# EAGLE board Main Board (EAGLE 9.7.0)
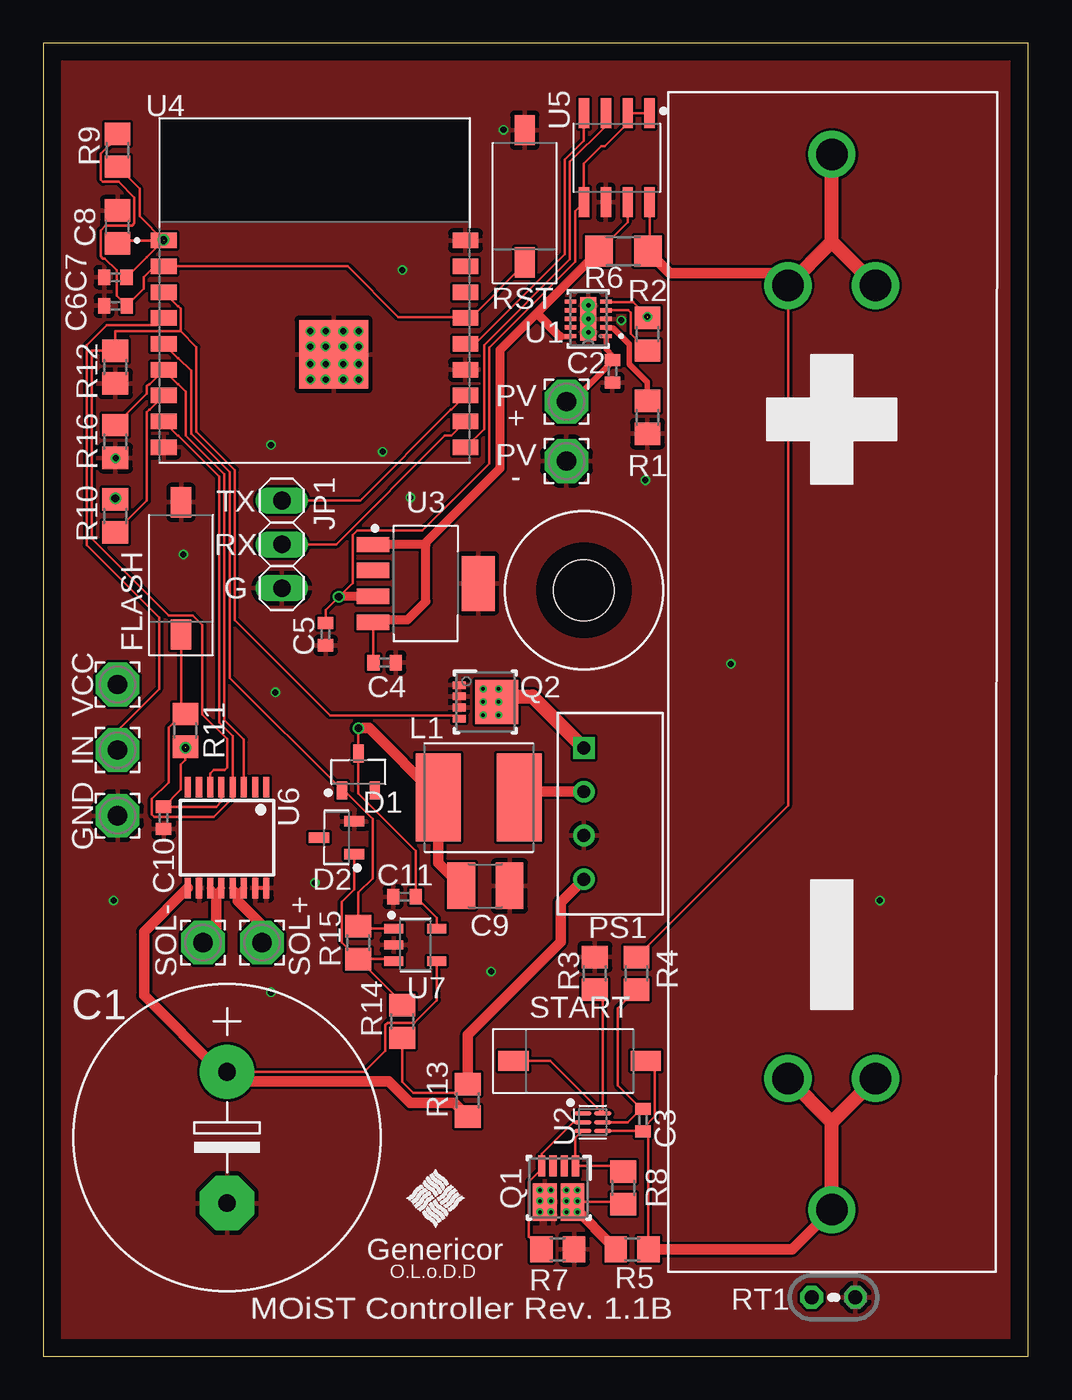
[diagram p0: board, top side]
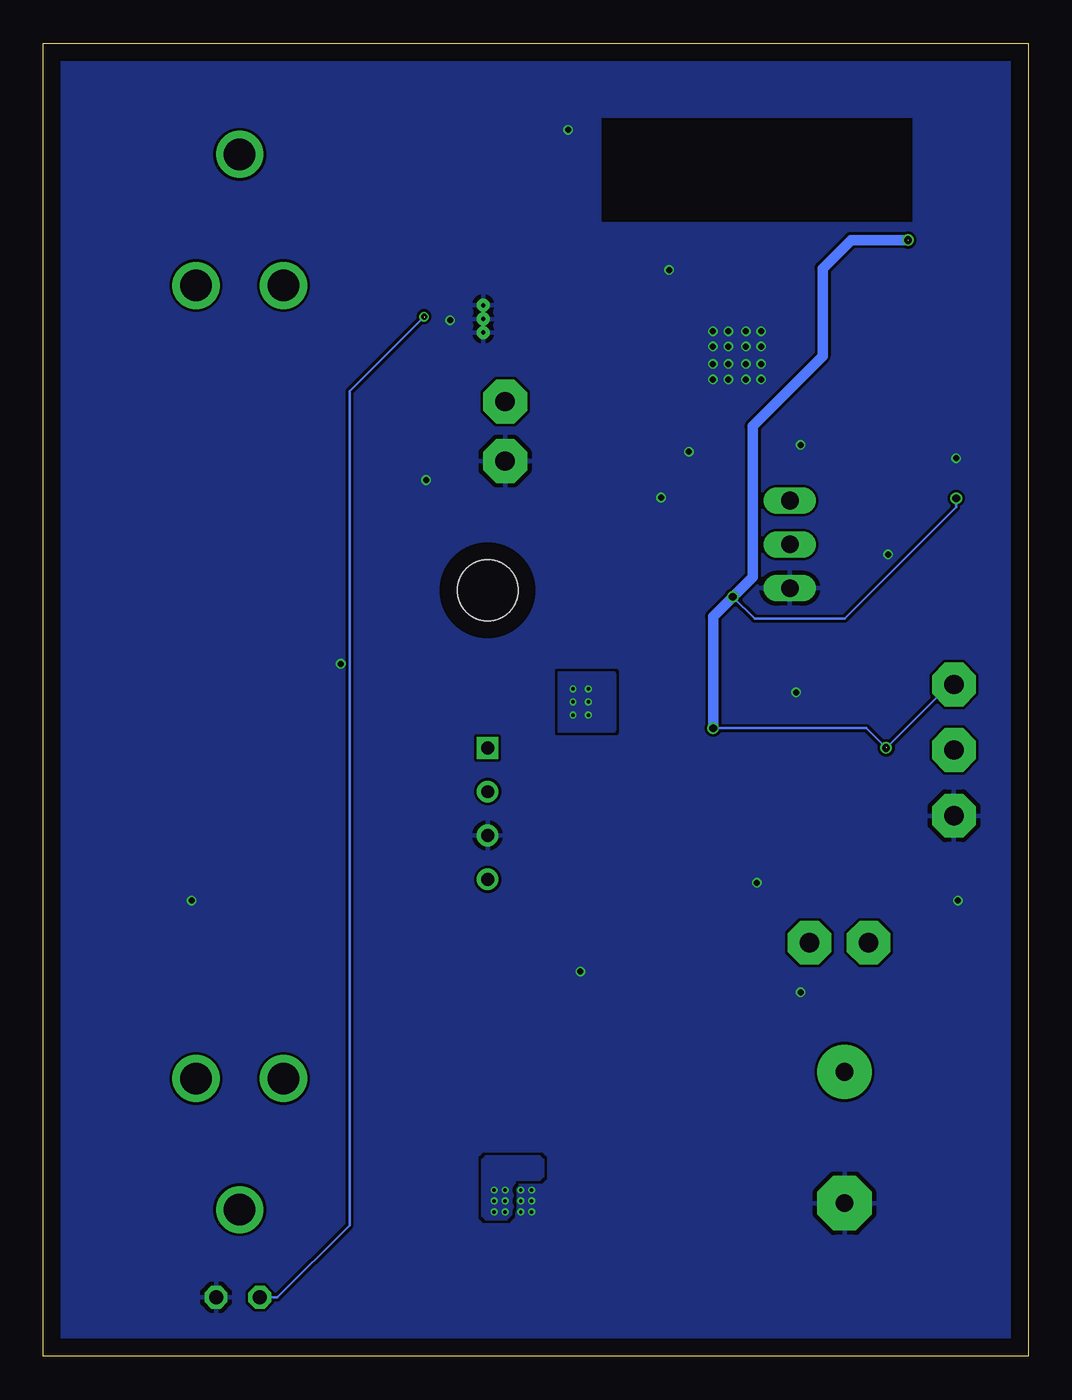
[diagram p1: board, bottom side, seen from below]

Size 57.15 x 76.2 mm. Coordinates in mm from the lower left corner, seen from the top.
Outline: 0,0 57.15,0 57.15,76.2 0,76.2 0,0
Copper layers (1*16): Top 0.035mm / dielectric 1.5mm / Bottom 0.035mm
Design rules "default *": minimum track width 6mil, minimum drill 0.35mm, track to track 6mil, track to pad 6mil, pad to pad 6mil, via to via 6mil, smd to smd 6mil, copper to edge 40mil, drill to drill 6mil, minimum pad ring 10mil, minimum via ring 4mil, stop-mask expansion 4mil, vias tented up to drill 0mil, thermal gap 10mil
Holes 3.5 mm at 31.37,44.45

## Footprints (pad centres in the part's own frame; a part is rotated, then mirrored left to right if it is on the bottom)
18650-65MM-54-PTH = drill 1.829: A1 -30.62,0; A2 -23,2.54; A3 -23,-2.54; C1 30.62,0; C2 23,2.54; C3 23,-2.54
E7,5-18 = drill 1.016 pad 3.15: + -3.81,0 | drill 1.016 pad 3.15 octagon: - 3.81,0
C0402 = smd 0.7 x 0.9: 1 -0.65,0; 2 0.65,0
C0805 = smd 1.3 x 1.5: 1 -0.95,0; 2 0.95,0
C1210 = smd 1.6 x 2.7: 1 -1.4,0; 2 1.4,0
SOT95P227X109-3N = smd 1.042 x 0.597: 1 -1.062,0.95; 2 -1.062,-0.95; 3 1.062,0
SOT95P240X110-3N = smd 1.18 x 0.609: 1 -1.024,0.95; 2 -1.024,-0.95; 3 1.024,0
S_43 = smd 1.759 x 1.177: A 3.836,0; C -3.836,0
1X03 = drill 1.016 long: 1 -2.54,0; 2 0,0; 3 2.54,0
2,54/1,1 = drill 1.118 pad 2.54 octagon: 1 0,0
INDM6060X450N = smd 2.619 x 5.111: 1 -2.346,0; 2 2.346,0
1S4E_S1U-DIP4 = drill 0.75 square: P$1 0,0 | drill 0.75: P$2 2.54,0; P$3 5.08,0; P$4 7.62,0
DMS0008A = smd 1.24 x 0.42: 1 -1.28,0.975; 2 -1.28,0.325; 3 -1.28,-0.325; 4 -1.28,-0.975 | smd 0.49 x 0.42: 5 1.655,-0.975; 6 1.655,-0.325; 7 1.655,0.325; 8 1.655,0.975 | smd 2.16 x 1.38: 9 0.82,0.805; 10 0.82,-0.805
DQG0008A = smd 0.75 x 0.44: 1 -1.525,0.975; 2 -1.525,0.325; 3 -1.525,-0.325; 4 -1.525,-0.975; 5 1.525,-0.975; 6 1.525,-0.325; 7 1.525,0.325; 8 1.525,0.975 | smd 2.5 x 2.55: 9 0.65,0
R0805 = smd 1.3 x 1.5: 1 -0.95,0; 2 0.95,0
R1206 = smd 1.6 x 1.803: 1 -1.422,0; 2 1.422,0
THERMISTOR = drill 0.813 octagon: 1 -1.27,0; 2 1.27,0
DQC10_P84X2P4 = smd 0.656 x 0.255: 1 -1.026,1; 2 -1.026,0.5; 3 -1.026,0; 4 -1.026,-0.5; 5 -1.026,-1; 6 1.026,-1; 7 1.026,-0.5; 8 1.026,0; 9 1.026,0.5; 10 1.026,1 | smd 0.94 x 2.515: 11 0,0 | drill 0.254 pad 0.508: V 0,-0.787; V_1 0,0; V_2 0,0.787
SON50P150X150X80-6N = smd 1.038 x 0.274: 1 -0.583,0.5; 2 -0.583,0; 3 -0.583,-0.5; 4 0.583,-0.5; 5 0.583,0; 6 0.583,0.5
SOT150P700X180-5N = smd 1.901 x 0.891: 1 -3.05,2.25; 2 -3.05,0.75; 3 -3.05,-0.75; 4 -3.05,-2.25 | smd 1.901 x 3.189: 5 3.05,0
MODULE_ESP-WROOM-02D = smd 1.5 x 0.9: 1 -8.75,2.9; 2 -8.75,1.4; 3 -8.75,-0.1; 4 -8.75,-1.6; 5 -8.75,-3.1; 6 -8.75,-4.6; 7 -8.75,-6.1; 8 -8.75,-7.6; 9 -8.75,-9.1; 10 8.75,-9.1; 11 8.75,-7.6; 12 8.75,-6.1; 13 8.75,-4.6; 14 8.75,-3.1; 15 8.75,-1.6; 16 8.75,-0.1; 17 8.75,1.4; 18 8.75,2.9 | smd 4 x 4: 19 1.1,-3.71
SOIC127P599X175-8N = smd 1.752 x 0.602: 1 -2.578,1.905; 2 -2.578,0.635; 3 -2.578,-0.635; 4 -2.578,-1.905; 5 2.578,-1.905; 6 2.578,-0.635; 7 2.578,0.635; 8 2.578,1.905
TSSOP16 = smd 0.35 x 1.2: 1 -2.275,-2.925; 2 -1.625,-2.925; 3 -0.975,-2.925; 4 -0.325,-2.925; 5 0.325,-2.925; 6 0.975,-2.925; 7 1.625,-2.925; 8 2.275,-2.925; 9 2.275,2.925; 10 1.625,2.925; 11 0.975,2.925; 12 0.325,2.925; 13 -0.325,2.925; 14 -0.975,2.925; 15 -1.625,2.925; 16 -2.275,2.925
SOT95P280X100-5N = smd 1.112 x 0.547: 1 -1.25,0.95; 2 -1.25,0; 3 -1.25,-0.95; 4 1.25,-0.95; 5 1.25,0.95

## Placement (x,y rotation side)
BATT  NCR18650B  [18650-65MM-54-PTH]  45.75,39.13 270 top
C1  4700µF  [E7,5-18]  10.67,12.7 270 top
C2  1µF  [C0402]  33.02,57.15 270 top
C3  0.1µF  [C0402]  34.8,13.72 270 top
C4  1µF  [C0402]  19.81,40.26 0 top
C5  1µF  [C0402]  16.38,41.91 270 top
C6  0.1µF  [C0402]  4.19,60.96 180 top
C7  0.1µF  [C0402]  4.19,62.61 180 top
C8  10µF  [C0805]  4.32,65.53 90 top
C9  2.2µF  [C1210]  25.65,27.3 0 top
C10  0.1µF  [C0402]  6.99,31.24 270 top
C11  0.1µF  [C0402]  20.95,26.67 180 top
D1  CMPD6263  [SOT95P227X109-3N]  18.29,33.91 90 top
D2  LM4040LM4040CIM3-8.2  [SOT95P240X110-3N]  17.02,30.1 180 top
FLASH  PTS636_SL43_SMTR_LFS  [S_43]  8,45.72 90 top
JP1  UART  [1X03]  13.84,47.12 270 top
JP2  PV+  [2,54/1,1]  30.35,55.4 0 top
JP3  PV-  [2,54/1,1]  30.35,51.94 0 top
JP4  SOL+  [2,54/1,1]  12.7,24 0 top
JP5  SOL-  [2,54/1,1]  9.27,24 0 top
JP6  VCC  [2,54/1,1]  4.32,38.99 0 top
JP7  IN  [2,54/1,1]  4.32,35.18 0 top
JP8  GND  [2,54/1,1]  4.32,31.37 0 top
L1  ASPI-6045S-180M-T  [INDM6060X450N]  25.27,32.43 0 top
PS1  1S4E-1U  [1S4E_S1U-DIP4]  31.37,35.31 270 top
Q1  CSD87313DMS  [DMS0008A]  29.9,9.78 270 top
Q2  CSD16406Q3  [DQG0008A]  25.65,37.97 0 top
R1  680Ω  [R0805]  35.05,54.48 90 top
R2  21.5kΩ  [R0805]  35.05,59.31 270 top
R3  330Ω  [R0805]  32,22.23 90 top
R4  330Ω  [R0805]  34.42,22.23 270 top
R5  56mΩ  [R0805]  34.16,6.22 0 top
R6  10mΩ  [R1206]  33.66,64.14 0 top
R7  5MΩ  [R0805]  29.84,6.22 0 top
R8  5MΩ  [R0805]  33.66,9.78 270 top
R9  10KΩ  [R0805]  4.32,69.98 90 top
R10  10KΩ  [R0805]  4.19,48.77 270 top
R11  10KΩ  [R0805]  8.26,36.32 90 top
R12  10KΩ  [R0805]  4.19,57.4 270 top
R13  100Ω  [R0805]  24.64,14.86 270 top
R14  10KΩ  [R0805]  20.83,19.43 270 top
R15  1MΩ  [R0805]  18.29,24 90 top
R16  10KΩ  [R0805]  4.19,53.09 270 top
RST  PTS636_SL43_SMTR_LFS  [S_43]  27.94,67.31 90 top
RT1  TT2-10KC8-3  [THERMISTOR]  45.85,3.43 180 top
START  PTS636_SL43_SMTR_LFS  [S_43]  31.11,17.14 0 top
U1  BQ24210  [DQC10_P84X2P4]  31.62,60.2 180 top
U2  BQ29733DSER  [SON50P150X150X80-6N]  31.88,13.59 0 top
U3  LP38693MPX-ADJ/NOPB  [SOT150P700X180-5N]  22.18,44.85 0 top
U4  ESP-WROOM-02D  [MODULE_ESP-WROOM-02D]  15.75,61.85 0 top
U5  INA219AID  [SOIC127P599X175-8N]  33.27,69.55 270 top
U6  TC78H630FNG/TSSOP16  [TSSOP16]  10.67,30.1 180 top
U7  LT1716  [SOT95P280X100-5N]  21.59,23.88 0 top
U$2  GENERICORLOGO  [GENERICORLOGO]  21.08,7.49 0 top

## Library data of the parts
BATT C1 D1 FLASH L1 PS1 Q1 Q2 RST RT1 START U1 U3 U5 U7 U$2 = Genericor Parts
C2-C11 = rcl; SPICEPREFIX: C
D2 = Genericor Parts; AVAILABILITY: In Stock; DESCRIPTION: Shunt Voltage Reference IC Fixed 8.192 V ±0.5% 15mA SOT-23-3; MF: Texas Instruments; MP: LM4040CIM3-8.2/NOPB; PACKAGE: SOT-23-3; PRICE: None; PURCHASE-URL: https://pricing.snapeda.com/search/part/LM4040/?ref=eda
JP1 = Connector; CATEGORY: CONNECTOR; SUB-CATEGORY: PIN-HEADER
JP2-JP8 = wirepad
R1-R16 = rcl; SPICEPREFIX: R
U2 = Genericor Parts; OCC: -0.100; OCC_DELAY: 8; OCD: 0.120; ODC_DELAY: 8; OVP: 4.400; OVP_DELAY: 1.25; SCD: 0.3; SCD_DELAY: 250; UVP: 2.800
U4 = Genericor Parts; AVAILABILITY: In Stock; DESCRIPTION: WiFi 802.11b/g/n Transceiver Module 2.4GHz ~ 2.5GHz Integrated, Trace Surface Mount; MF: Espressif Systems; MP: ESP-WROOM-02D; PACKAGE: SMD-18 Espressif Systems; PRICE: None; PURCHASE-URL: https://pricing.snapeda.com/search/part/ESP-WROOM-02D/?ref=eda
U6 = Genericor Parts; AVAILABILITY: Not in stock; DESCRIPTION: Motor Driver IC; MF: Toshiba; MP: TC78H630FNG; PACKAGE: TSSOP-16d; PRICE: None

## Nets
8.2VREF: D2.1 R14.1 R15.1 U7.3
9V+: PS1.P$4 R13.1 R14.2
!CHGD: D1.1 R15.2 U4.5 U7.1
+3V3: C5.1 C7.1 C8.1 C9.1 C10.1 C11.1 D1.3 JP6.1 L1.1 R9.1 R10.1 R11.1 U3.3 U4.1 U5.1 U5.2 U5.5 U6.5 U7.5
BAT: C3.1 R4.2 U2.5
BATT+: BATT.A1 BATT.A2 BATT.A3 R4.1 R6.2 U5.8
BATT-: BATT.C1 BATT.C2 BATT.C3 C3.2 R5.2 START.A U2.4
COUT: Q1.4 R7.1 U2.2
DOUT: Q1.1 R8.1 U2.3
DRV_1: FLASH.C R11.2 U4.8 U6.4
DRV_2: R16.1 U4.6 U6.3
DRV_EN: Q2.4 R12.1 U4.3 U6.6
EN-RST: C6.1 R9.2 RST.C U4.2 U4.15
GND: C1.- C2.2 C4.2 C5.2 C6.2 C7.2 C8.2 C9.2 C10.2 C11.2 D2.2 FLASH.A JP1.3 JP3.1 JP8.1 PS1.P$3 Q1.5 Q1.6 Q1.10 Q2.1 Q2.2 Q2.3 R1.1 R3.2 R7.2 R12.2 R16.2 RST.A RT1.1 U1.3 U1.11 U1.V U1.V_1 U1.V_2 U3.5 U4.9 U4.13 U4.18 U4.19 U5.6 U6.10 U6.15 U6.16 U7.2
IO2: R10.2 U4.7
ISET: R1.2 U1.2
METER: JP7.1 U4.4
PG-EN: U1.6 U1.7
PS1+IN: L1.2 PS1.P$2
PS1-IN: PS1.P$1 Q2.5 Q2.6 Q2.7 Q2.8 Q2.9
PV+: C2.1 JP2.1 U1.1
Q1S1: Q1.7 Q1.8 Q1.9 R5.1 R8.2
RXD: JP1.2 U4.11
SCL: U4.14 U5.4
SDA: U4.10 U5.3
SOL+: JP4.1 U6.13 U6.14
SOL-: JP5.1 U6.11 U6.12
TS: R2.1 RT1.2 U1.5
TXD: JP1.1 U4.12
V-: R3.1 START.C U2.6
VBATT: C4.1 R6.1 U1.10 U3.1 U3.4 U5.7
VM: C1.+ R13.2 U6.9 U7.4
VTSB: R2.2 U1.4

## Tracks (layer width: path | path; a pad name or v marks a point on that pad's centre or on a via)
8.2VREF
  Top 0.152: R15.1 20.83,20.51 R14.1 | U7.3 20.34,23.05 R15.1 | D2.1 18.04,27.09 17.31,26.36 17.31,24.03 R15.1
9V+
  Top 0.152: R13.1 24.13,15.3 21.46,15.3 20.83,15.94 R14.2
  Top 0.61: R13.1 24.64,18.67 30.02,24.05 30.02,26.34 PS1.P$4
!CHGD
  Top 0.152: U7.1 18.41,24.83 R15.2 18.29,26.91 19.11,27.73 19.11,31.19 17.46,32.85 D1.1 10.82,39.37 10.82,51.31 8.59,53.55 8.59,57.18 7.84,57.93 7.82,57.93 U4.5
+3V3  (via drill 0.45)  (2 unrouted)
  Top 0.152: U7.5 22.84,25.43 C11.1 21.61,29.34 18.29,32.65 D1.3 v18.29,36.45 | U5.1 U5.2 | 7.87,34.99 R11.1 8.26,34.62 7.99,34.35 7.99,32.9 C10.1 7,31.88 10.03,31.88 10.34,32.19 U6.5 10.35,33.02 | C7.1 6.02,63.79 6.97,64.75 U4.1 | U4.1 4.49,64.75 C8.1 | U4.1 5.6,66.15 5.6,67.74 R9.1 | U5.2 33.91,71.73 | 18.69,44.1 U3.3 | C5.1 16.38,43.31 v17.14,44.07 17.95,44.88 17.95,47.64 18.21,47.9 22,47.9 25.88,51.79 25.88,58.54 30.86,63.52 30.86,66.46 U5.5 31.37,69.19 32.38,70.21 32.57,70.21 33.91,71.55 U5.2 | R10.1 v4.19,49.78
  Top 0.508: U3.3 17.11,44.1 v17.14,44.07
  Top 0.61: C9.1 22.93,28.63 L1.1 18.91,36.45 v18.29,36.45
  Bottom 0.152: v18.29,36.45 9.4,36.45 v8.26,35.31 4.57,38.99 JP6.1 | v17.14,44.07 15.88,42.8 10.67,42.8 4.19,49.28 v4.19,49.78
  Bottom 0.305: v18.29,36.45 18.22,36.51
  Bottom 0.61: v18.29,36.45 18.29,42.93 v17.14,44.07 16,45.21 16,53.98 11.94,58.04 11.94,63.12 10.29,64.77 v6.99,64.77
BAT
  Top 0.152: U2.5 33.92,13.59 34.7,14.37 | C3.1 34.7,14.37 | 34.7,14.37 33.34,15.73 33.34,20.19 R4.2
BATT+
  Top 0.152: BATT.A3 43.21,31.96 R4.1 | U5.8 35.18,64.24 R6.2
  Top 0.61: BATT.A3 42.47,62.87 36.35,62.87 R6.2
  Top 0.813: 45.75,64.67 BATT.A1 | 45.75,64.67 BATT.A3 | 45.75,64.67 BATT.A2
BATT-
  Top 0.152: R5.2 35.11,12.75 C3.2 | C3.2 34.8,13.24 35.48,13.92 35.48,16.62 START.A | U2.4 34.77,13.09 C3.2
  Top 0.61: R5.2 43.46,6.22 BATT.C1
  Top 0.813: 45.75,13.59 BATT.C3 | BATT.C1 45.75,13.59 | 45.75,13.59 BATT.C2
COUT
  Top 0.152: R7.1 28.18,6.94 28.18,10.13 28.93,10.88 Q1.4 28.93,11.76 30.76,13.59 U2.2
DOUT
  Top 0.152: R8.1 33.33,11.06 Q1.1 30.88,12.67 U2.3
DRV_1
  Top 0.152: U4.8 7.82,53.43 7.84,53.43 10.21,51.06 10.21,36.79 10.99,36.01 U6.4 10.99,32.41 9.9,31.31 6.44,31.31 6.31,31.45 6.31,32.34 7.28,33.31 7.28,36.49 8.06,37.27 R11.2 8,37.53 FLASH.C
DRV_2
  Top 0.152: U6.3 11.64,35.79 10.52,36.92 10.52,51.19 8.28,53.42 8.28,55.99 7.84,56.43 7.82,56.43 U4.6 6.18,56.43 6.15,56.43 6.02,56.29 6.02,55.86 R16.1
DRV_EN
  Top 0.152: U6.6 9.69,33.82 9.91,34.04 10.54,34.04 10.67,34.16 10.67,35.81 9.23,37.25 9.23,42.44 8.68,42.99 7.29,42.99 2.83,47.45 2.83,58.35 R12.1 4.19,59.5 7.96,59.5 7.98,59.48 | U4.3 7.82,60.93 7.84,60.93 7.98,60.79 7.98,59.48 | 7.98,59.48 8.89,58.57 8.89,53.67 11.13,51.44 11.13,42.72 16.64,37.2 23.93,37.2 Q2.4
EN-RST
  Top 0.152: R9.2 4.32,70.75 3.34,69.77 3.34,68.28 3.47,68.15 4.38,68.15 5.3,67.23 5.3,65.74 5.16,65.6 3.62,65.6 3.34,65.33 3.34,63.84 3.47,63.7 3.57,63.7 4.26,63.01 4.26,61.54 C6.1 5.84,61.96 5.84,62.61 6.48,63.25 U4.2 17.66,63.25 20.61,60.31 24.44,60.31 U4.15 24.8,60.25 27.94,63.39 RST.C
GND  (via drill 0.2, 0.35)
  Top 0.203: U6.15 U6.16
  other vias: 15.5,59.48 28.81,9.65 29.45,9.65 28.81,9.02 29.45,9.02 29.45,8.38 28.81,8.38 16.39,59.48 17.41,59.48 18.3,59.48 15.5,58.59 15.5,57.58 15.5,56.69 16.39,58.59 17.41,58.59 18.3,58.59 16.39,57.58 17.41,57.58 18.3,57.58 16.39,56.69 17.41,56.69 18.3,56.69 4.2,52.12 8.14,46.53 39.89,40.18 15.76,27.48 20.84,63.04 13.22,52.88 13.47,38.53 19.69,52.5 34.93,50.85 48.54,26.45 13.22,21.13 4.09,26.45 26.7,71.17 33.54,60.12 25.99,22.33 21.3,49.83
  pour Top: 0.08,0.08 57.07,0.08 57.07,76.12 0.08,76.12
  pour Bottom (rank 6): 0.08,0.08 57.07,0.08 57.07,76.12 0.08,76.12
IO2
  Top 0.152: U4.7 6.18,54.93 6.15,54.93 6.02,54.79 6.02,49.65 R10.2
ISET
  Top 0.305: U1.2 32.69,59.66 33.08,59.66 34,58.74 34,57.58 35.05,56.53 R1.2
METER
  Top 0.152: U4.4 6.58,59.84 3.7,59.84 2.53,58.67 2.53,47.07 6.73,42.87 6.73,38.73 4.32,36.32 JP7.1
PG-EN
  Top 0.152: U1.6 U1.7
PS1+IN
  Top 0.61: PS1.P$2 27.95,32.77 L1.2
PS1-IN  (via drill 0.2)
  Top 0.152: Q2.7 26.63,38.3 Q2.9 v25.53,37.97 | Q2.7 Q2.6 Q2.5 | Q2.7 Q2.8
  Top 0.813: Q2.7 28.38,38.3 PS1.P$1
  other vias: 26.42,37.97 26.42,38.73 25.53,38.73 25.53,37.21 26.42,37.21
  pour Bottom (isolate 0.254): 24.03,36.27 27.23,36.27 27.23,39.67 24.03,39.67 23.95,39.59 23.95,36.35
PV+
  Top 0.305: U1.1 32.65,58.44 33.02,58.06 C2.1 33.02,57.73 30.69,55.4 JP2.1
Q1S1  (via drill 0.2)
  Top 0.152: R8.2 33.52,8.96 Q1.9 | v30.35,9.02 30.41,8.96 Q1.9 | Q1.9 30.7,8.66 v30.99,8.38 | Q1.9 30.7,8.6 Q1.7
  Top 0.305: Q1.9 30.88,8.79 Q1.8
  Top 0.61: Q1.9 30.68,8.94 30.68,8.76 R5.1
  other vias: 30.35,8.38 30.99,9.02 30.35,9.65 30.99,9.65
  pour Bottom (isolate 0.254): 29.78,10.2 29.79,10.18 29.79,8.41 30.26,7.95 31.46,7.95 31.67,8.16 31.67,11.4 31.46,11.61 28.35,11.61 28.14,11.4 28.14,10.45 28.35,10.24 29.73,10.24 29.76,10.22
RXD
  Top 0.152: U4.11 24.36,54.12 23.68,53.43 23.31,53.43 17,47.12 JP1.2
SCL
  Top 0.152: U4.14 25.05,58.75 30.25,63.95 30.25,69.43 31.37,70.55 U5.4
SDA
  Top 0.152: U5.3 32.64,71.39 30.56,69.31 30.56,63.66 25.58,58.68 25.58,53.81 24.52,52.75 U4.10
SOL+
  Top 0.406: U6.13 11.3,26.86 11.3,26.83 | U6.14 11.3,26.83 | 11.3,26.42 11.3,26.83
  Top 0.61: JP4.1 12.7,25.02 11.3,26.42
SOL-
  Top 0.406: U6.11 10.03,26.83 | 10.03,26.83 10.03,26.42 | U6.12 10.03,26.86 10.03,26.83
  Top 0.61: JP5.1 10.03,24.77 10.03,26.42
TS  (via drill 0.35)  (1 unrouted)
  Top 0.152: 35.05,60.08 R2.1 35.05,60.34 34.24,61.16 32.97,61.16 32.95,61.18 32.67,61.18 U1.5
  Bottom 0.152: RT1.2 43.56,3.43 39.37,7.62 39.37,56.01 v35.05,60.33
TXD
  Top 0.152: U4.12 23.68,54.93 23.65,54.93 18.38,49.66 JP1.1
V-
  Top 0.152: START.C 29.4,17.14 U2.6 32.46,20.82 R3.1
VBATT
  Top 0.152: U5.7 33.91,65.81 R6.1 | C4.1 19.16,42.57 U3.4
  Top 0.305: U1.10 30.58,59.18 29.97,59.18
  Top 0.508: R6.1 28.63,60.53 | 28.63,60.53 26.49,58.39 26.49,51.52 22.2,47.23 22.2,47.1 | 22.2,47.1 U3.1 | 28.63,60.53 29.97,59.18 | U3.4 19.27,42.74 21.14,42.74 22.2,43.8 22.2,47.1
VM
  Top 0.152: C1.+ 18.62,16.51 19.85,17.74 19.85,19.23 19.98,19.36 21.53,19.36 22.84,20.67 U7.4
  Top 0.61: U6.9 5.85,24.63 5.85,20.94 10.29,16.51 C1.+ 11.21,15.97 20.04,15.97 21.31,14.7 23.84,14.7 R13.2
VTSB
  Top 0.152: R2.2 34.07,59.34 34.07,60.57 33.94,60.7 U1.4
(copper drawn outside any net)
  shapes: Bottom area x1, Top area x3

## Text on the board
tNames: PV / + | PV / - | TX / RX / G | VCC | IN | GND | SOL- | SOL+ | Genericor | O.L.o.D.D | MOiST Controller Rev. 1.1B